# EAGLE board Board (EAGLE 6.4)
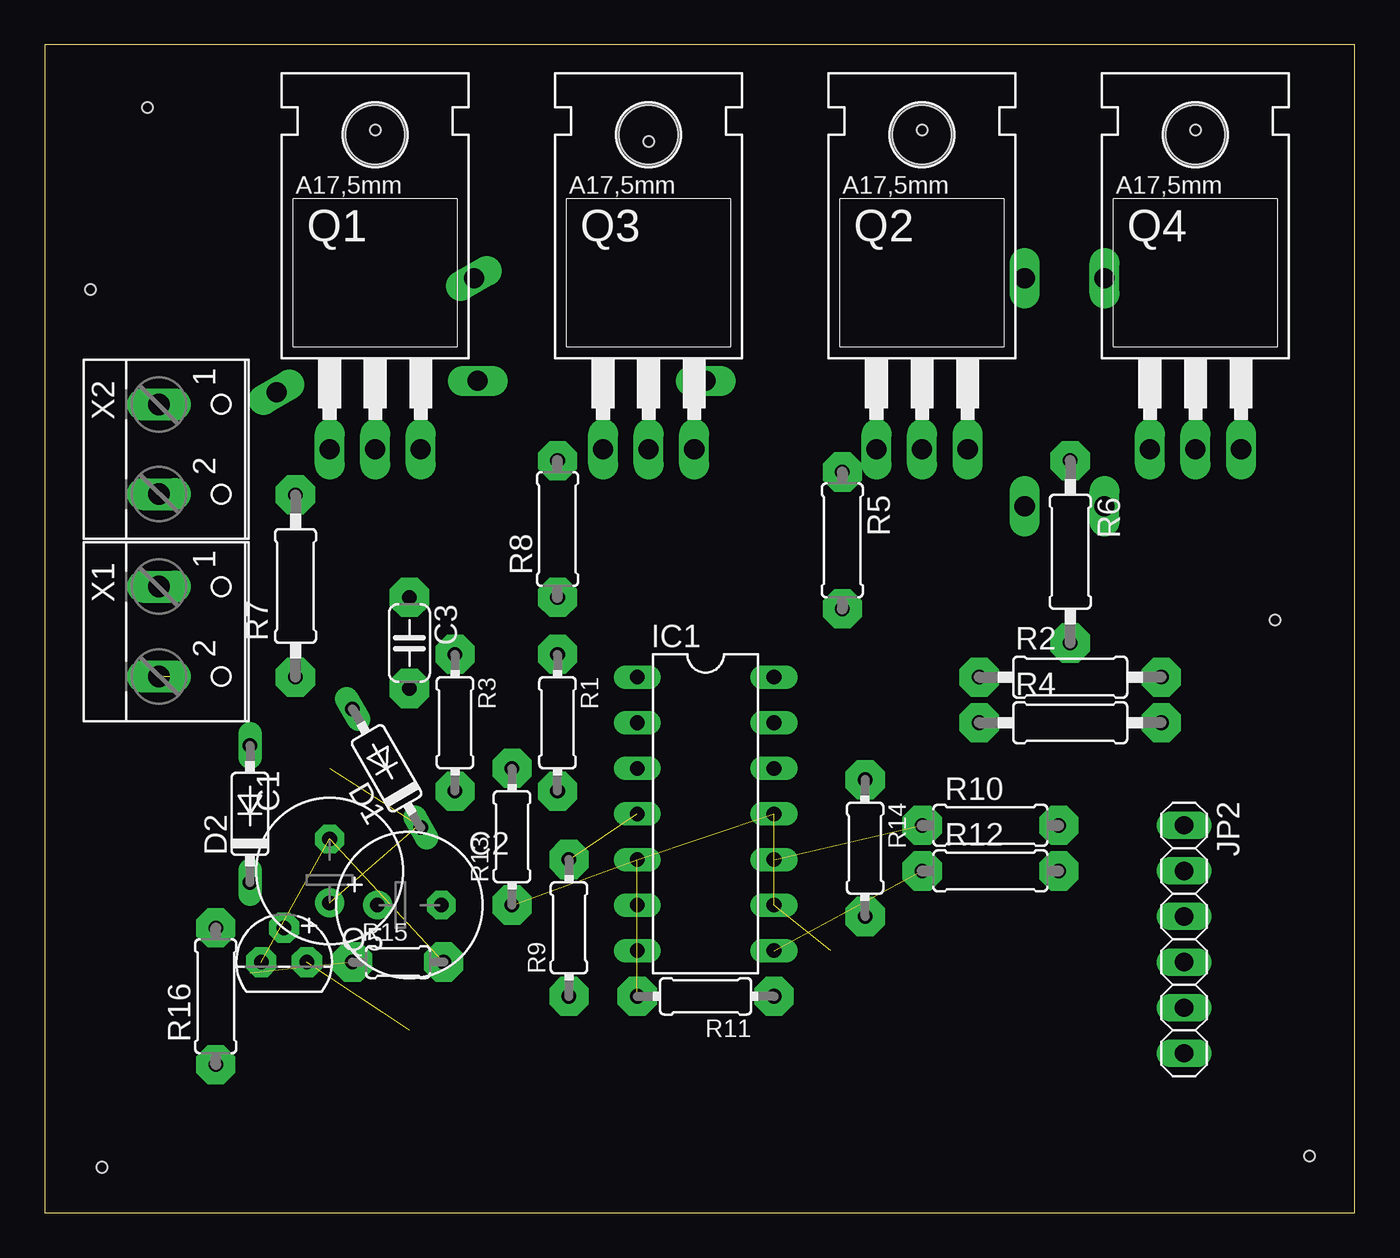
[diagram p0: board, top side]
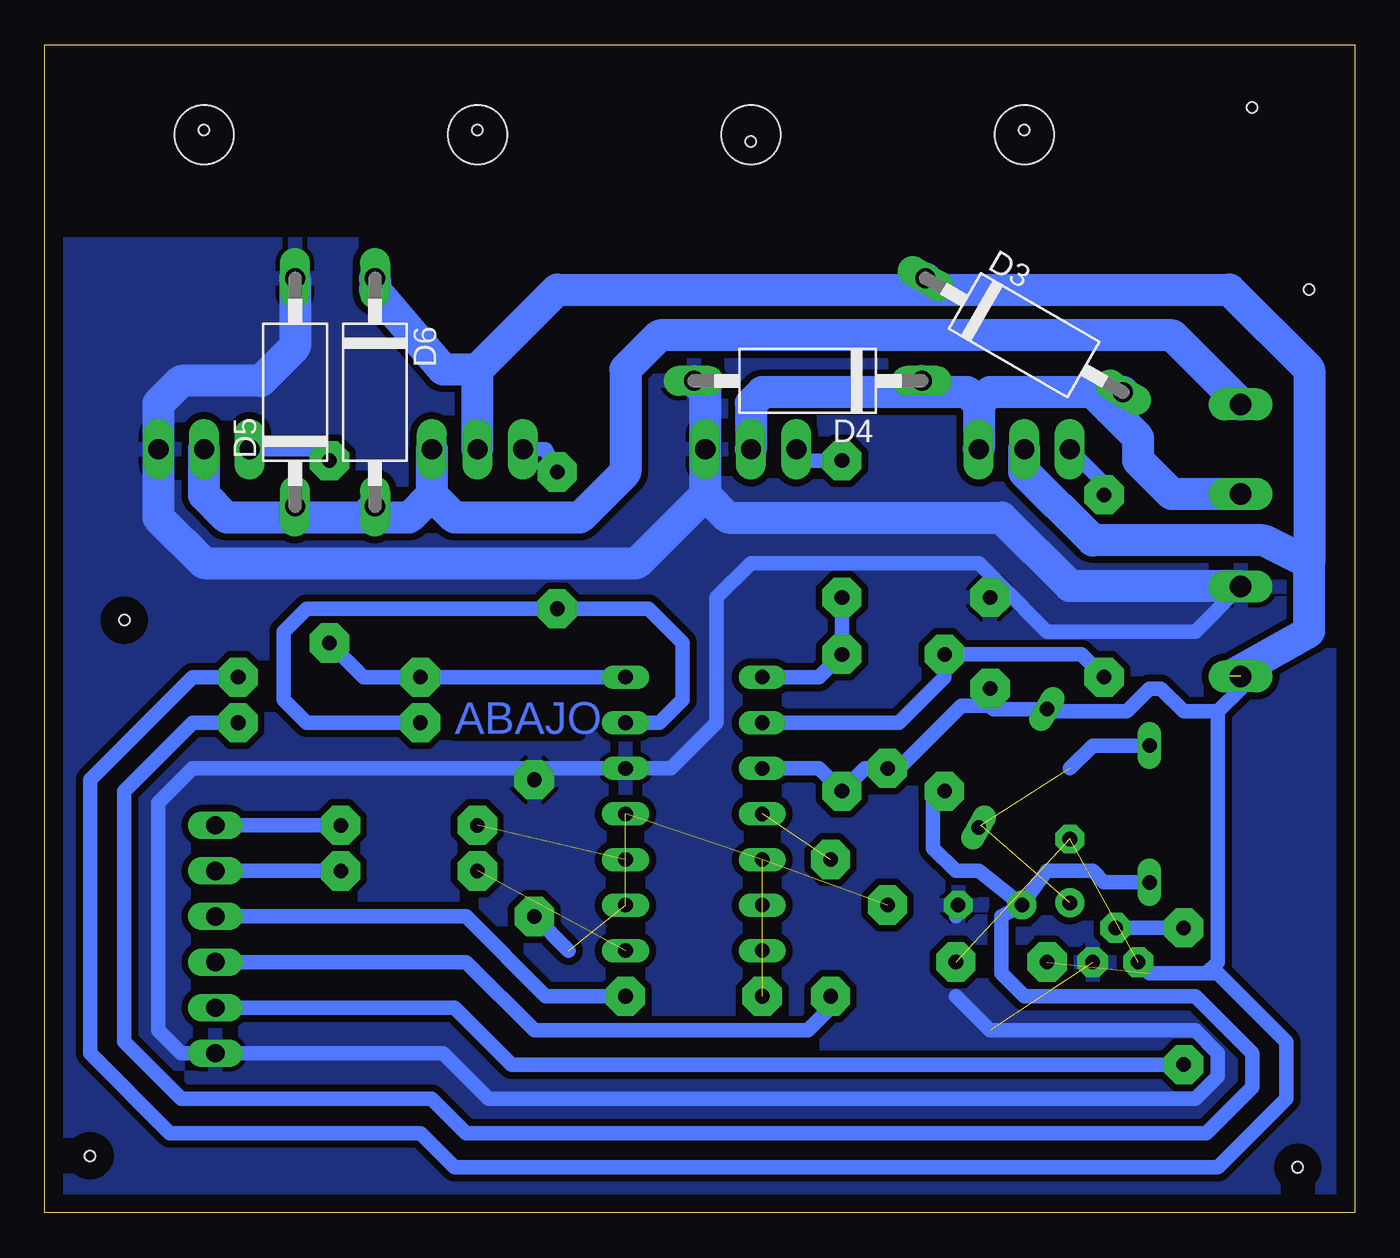
[diagram p1: board, bottom side, seen from below]

Size 73 x 65.08 mm. Coordinates in mm from the lower left corner, seen from the top.
Outline: 0,0 73,0 73,65.08 0,65.08 0,0
Copper layers (1*16): Top 0.035mm / dielectric 1.5mm / Bottom 0.035mm
Design rules "default *": minimum track width 10mil, minimum drill 24mil, track to track 15mil, track to pad 15mil, pad to pad 15mil, via to via 15mil, smd to smd 15mil, copper to edge 40mil, drill to drill 8mil, minimum pad ring 10mil, minimum via ring 8mil, stop-mask expansion 4mil, vias tented up to drill 0mil, thermal gap 10mil
Holes 0.6 mm at 5.71,61.59 18.41,60.33 33.66,59.69 48.9,60.33 64.13,60.33 68.58,33.02 70.48,3.18 3.17,2.54 2.54,51.44

## Footprints (pad centres in the part's own frame; a part is rotated, then mirrored left to right if it is on the bottom)
E3,5-8 = drill 0.813 pad 1.6: + -1.778,0 | drill 0.813 pad 1.6 octagon: - 1.778,0
C050-024X044 = drill 0.813 pad 2.184 octagon: 1 -2.54,0; 2 2.54,0
DO35-7 = drill 0.813 long: A 3.81,0; C -3.81,0
DO15-12 = drill 1.118 long: A 6.35,0; C -6.35,0
DIL14 = drill 0.813 long: 1 -7.62,-3.81; 2 -5.08,-3.81; 3 -2.54,-3.81; 4 0,-3.81; 5 2.54,-3.81; 6 5.08,-3.81; 7 7.62,-3.81; 8 7.62,3.81; 9 5.08,3.81; 10 2.54,3.81; 11 0,3.81; 12 -2.54,3.81; 13 -5.08,3.81; 14 -7.62,3.81
1X06 = drill 1.016 long: 1 -6.35,0; 2 -3.81,0; 3 -1.27,0; 4 1.27,0; 5 3.81,0; 6 6.35,0
TO220 = drill 1.118 long: 1 -2.54,-6.35; 2 0,-6.35; 3 2.54,-6.35 | hole 3.302: 0,11.176
TO92 = drill 0.813 pad 1.676 octagon: 1 1.27,0; 2 0,1.905; 3 -1.27,0
0204/7 = drill 0.813 pad 2.184 octagon: 1 -3.81,0; 2 3.81,0
0207/10 = drill 0.813 pad 2.184 octagon: 1 -5.08,0; 2 5.08,0
0207/7 = drill 0.813 pad 2.184 octagon: 1 -3.81,0; 2 3.81,0
0204/5 = drill 0.813 pad 2.184 octagon: 1 -2.54,0; 2 2.54,0
W237-102 = drill 1.194 long: 1 -2.5,-1.27; 2 2.5,-1.27

## Placement (x,y rotation side)
C1  100uF  [E3,5-8]  15.88,19.05 90 top
C2  100uF  [E3,5-8]  20.32,17.14 0 top
C3  [C050-024X044]  20.32,31.75 270 top
D1  1N4148DO35-7  [DO35-7]  19.05,24.77 120 top
D2  1N4148DO35-7  [DO35-7]  11.43,22.23 90 top
D3  1N5060GP  [DO15-12]  18.41,48.9 330 bottom
D4  1N5060GP  [DO15-12]  30.48,46.36 180 bottom
D5  1N5060GP  [DO15-12]  59.05,45.72 90 bottom
D6  1N5060GP  [DO15-12]  54.61,45.72 270 bottom
IC1  LM339N  [DIL14]  36.83,22.23 270 top
JP2  [1X06]  63.5,15.24 270 top
Q1  IRFZ48n  [TO220]  18.41,48.9 0 top
Q2  IRFZ48n  [TO220]  48.9,48.9 0 top
Q3  IRFZ48n  [TO220]  33.66,48.9 0 top
Q4  IRFZ48n  [TO220]  64.13,48.9 0 top
Q5  BC337  [TO92]  13.34,13.97 0 top
R1  4k7  [0204/7]  28.57,27.31 270 top
R2  4k7  [0207/10]  57.15,29.85 0 top
R3  27k  [0204/7]  22.86,27.31 270 top
R4  27k  [0207/10]  57.15,27.31 0 top
R5  10  [0207/7]  44.45,37.47 270 top
R6  10  [0207/10]  57.15,36.83 270 top
R7  10  [0207/10]  13.97,34.93 90 top
R8  10  [0207/7]  28.57,38.1 90 top
R9  330  [0204/7]  29.21,15.88 90 top
R10  330  [0207/7]  52.71,21.59 0 top
R11  330  [0204/7]  36.83,12.07 180 top
R12  330  [0207/7]  52.71,19.05 0 top
R13  27k  [0204/7]  26.04,20.96 90 top
R14  10k  [0204/7]  45.72,20.32 270 top
R15  1k5  [0204/5]  19.68,13.97 0 top
R16  330  [0207/7]  9.53,12.07 90 top
X1  12Vcc IN  [W237-102]  7.62,32.39 270 top
X2  MOTOR DC  [W237-102]  7.62,42.55 270 top

## Library data of the parts
C1-C3 R1-R16 = rcl
D1-D6 = diode
IC1 = linear
JP2 = pinhead
Q1-Q4 = transistor-fet
Q5 = transistor-npn
X1 X2 = con-wago-500; MPN: 237-102; OC_FARNELL: unknown; OC_NEWARK: 70K9898

## Nets
+3V3: IC1.5 IC1.7 IC1.9 IC1.11 R13.1 R14.2
+12V: C3.2 D1.A D3.C D6.C IC1.3 Q1.2 Q2.2 R1.2 R2.2 R13.2 R15.1 X1.2
+15V: C2.+ D2.C R3.2 R4.2
GND: C2.- C3.1 D4.A D5.A IC1.12 JP2.6 Q3.3 Q4.3 Q5.1 R14.1 X1.1
N$1: IC1.2 R3.1 R7.1
N$2: IC1.13 R4.1 R5.2
N$3: Q1.1 R7.2
N$4: Q2.1 R5.1
N$5: IC1.14 R2.1 R6.2
N$6: IC1.1 R1.1 R8.1
N$7: IC1.4 R9.2
N$8: IC1.10 R10.1
N$9: Q4.1 R6.1
N$10: IC1.8 R12.1
N$11: Q3.1 R8.2
N$12: IC1.6 R11.2
N$13: D3.A D4.C Q1.3 Q3.2 X2.2
N$14: JP2.4 R9.1
N$15: JP2.1 R10.2
N$16: D5.C D6.A Q2.3 Q4.2 X2.1
N$17: JP2.3 R11.1
N$18: JP2.2 R12.2
N$19: C1.+ D1.C D2.A
N$20: Q5.2 R16.2
N$21: JP2.5 R16.1
N$22: C1.- Q5.3 R15.2

## Tracks (layer width: path | path; a pad name or v marks a point on that pad's centre or on a via)
+3V3  (5 unrouted)
  Bottom 0.813: 43.82,14.61 R14.2
+12V  (2 unrouted)
  Bottom 0.813: 11.43,13.34 8.26,13.34 | 8.26,13.34 7.62,13.97 7.62,27.94 | 7.62,27.94 6.35,29.21 X1.2 | 20.32,28.26 21.91,28.26 25.4,24.77 R13.2 27.3,24.77 R1.2 29.84,24.77 IC1.3 | C3.2 20.32,28.26 | R2.2 64.77,29.85 70.48,24.13 70.48,8.89 66.04,4.45 52.07,4.45 50.16,2.54 7.62,2.54 3.81,6.35 3.81,9.53 7.62,13.34 8.26,13.34 | 7.62,27.94 9.53,27.94 10.79,29.21 11.43,29.21 12.7,27.94 17.02,27.94 D1.A 20.13,28.07 20.32,28.26
  Bottom 1.778: 6.95,29.89 2.54,32.39 2.54,36.2 | 2.54,36.2 5.08,37.47 14.61,37.47 18.41,41.28 Q1.2 | Q2.2 48.9,46.99 | 48.9,46.99 44.45,51.44 23.49,51.44 | 23.49,51.44 6.99,51.44 2.54,46.99 2.54,36.2 | D3.C 23.91,51.85 23.49,51.44 | D6.C 54.61,51.44 50.8,46.99 48.9,46.99
+15V
  Bottom 0.813: R4.2 64.77,27.31 68.58,23.5 68.58,9.53 65.41,6.35 51.44,6.35 49.53,4.45 8.26,4.45 5.71,6.99 5.71,8.89 8.89,12.07 18.41,12.07 19.68,13.34 19.68,16.51 C2.+ | D2.C 13.97,18.42 14.61,19.05 17.14,19.05 C2.+ | R3.2 23.49,22.86 23.49,20.32 22.22,19.05 20.95,19.05 C2.+
GND  (1 unrouted)
  Bottom 0.813: 45.72,24.77 IC1.12 38.1,24.77 35.56,27.31 35.56,34.29 33.66,36.2 20.95,36.2 19.68,34.93 | 45.72,24.77 64.77,24.77 66.67,22.86 66.67,10.16 65.41,8.89 JP2.6 50.8,8.89 48.26,6.35 8.89,6.35 7.62,7.62 7.62,8.89 8.89,10.16 20.32,10.16 22.22,12.07 | R14.1 45.72,24.77 | X1.1 6.39,34.89 8.89,32.39 17.14,32.39 19.68,34.93 | C3.1 19.68,34.93 | C2.- 22.22,16.51
  Bottom 1.778: 36.2,40.01 34.93,38.73 19.68,38.73 15.88,34.93 6.39,34.93 X1.1 | 36.2,40.01 Q3.3 36.2,45.72 D4.A | 36.2,40.01 40.01,36.2 64.13,36.2 66.67,38.73 Q4.3 66.67,45.09 65.41,46.36 60.96,46.36 59.05,48.26 D5.A
  pour Bottom: 0,53.98 0,0 73.02,0 73.02,53.98
N$1
  Bottom 0.813: R7.1 15.24,31.11 R3.1 22.86,29.85 25.4,27.31 IC1.2
N$2
  Bottom 0.813: IC1.13 38.73,27.31 37.47,28.57 37.47,31.75 39.37,33.66 R5.2 58.42,33.66 59.69,32.39 59.69,28.57 58.42,27.31 R4.1
N$3
  Bottom 0.813: 15.88,41.86 Q1.1 13.97,40.64 R7.2
N$4
  Bottom 0.813: Q2.1 45.09,42.55 R5.1
N$5
  Bottom 0.813: IC1.14 R2.1 55.25,29.85 R6.2
N$6
  Bottom 0.813: IC1.1 29.84,29.85 R1.1 R8.1
N$7  (1 unrouted)
N$8  (1 unrouted)
N$9
  Bottom 0.813: R6.1 57.79,42.55 Q4.1
N$10  (1 unrouted)
N$11
  Bottom 0.813: R8.2 30.48,41.91 Q3.1
N$12  (1 unrouted)
N$13
  Bottom 1.778: X2.2 10.2,40.05 12.06,41.91 12.06,43.18 13.65,44.77 | 13.65,44.77 14.61,45.72 20.32,45.72 20.95,45.09 | 20.95,45.09 21.59,45.72 23.49,45.72 | 23.49,45.72 33.02,45.72 33.66,45.09 Q3.2 | 20.95,45.09 Q1.3 | D4.C 23.49,45.72 | D3.A 12.92,45.5 13.65,44.77
N$14
  Bottom 0.813: JP2.4 49.53,13.97 45.72,10.16 30.48,10.16 29.21,11.43 R9.1
N$15
  Bottom 0.813: R10.2 JP2.1
N$16
  Bottom 1.778: Q2.3 51.44,40.01 | 51.44,40.01 52.71,38.73 55.25,38.73 | 55.25,38.73 59.05,38.73 | 59.05,38.73 62.87,38.73 64.13,40.01 Q4.2 | X2.1 6.31,45.05 10.16,48.9 38.73,48.9 40.64,46.99 40.64,41.28 43.18,38.73 50.16,38.73 51.44,40.01 | D6.A 55.25,38.73 | D5.C 59.05,38.73
N$17
  Bottom 0.813: R11.1 45.09,12.07 49.53,16.51 JP2.3
N$18
  Bottom 0.813: JP2.2 R12.2
N$19  (2 unrouted)
  Bottom 0.813: D2.A 14.61,26.04 15.88,24.77 | 20.83,21.59 D1.C
N$20
  Bottom 0.813: Q5.2 R16.2
N$21
  Bottom 0.813: R16.1 46.99,8.25 50.16,11.43 JP2.5
N$22  (2 unrouted)

## Text on the board
Bottom: ABAJO